# EAGLE board Auto_hub_robocon (EAGLE 8.5.1)
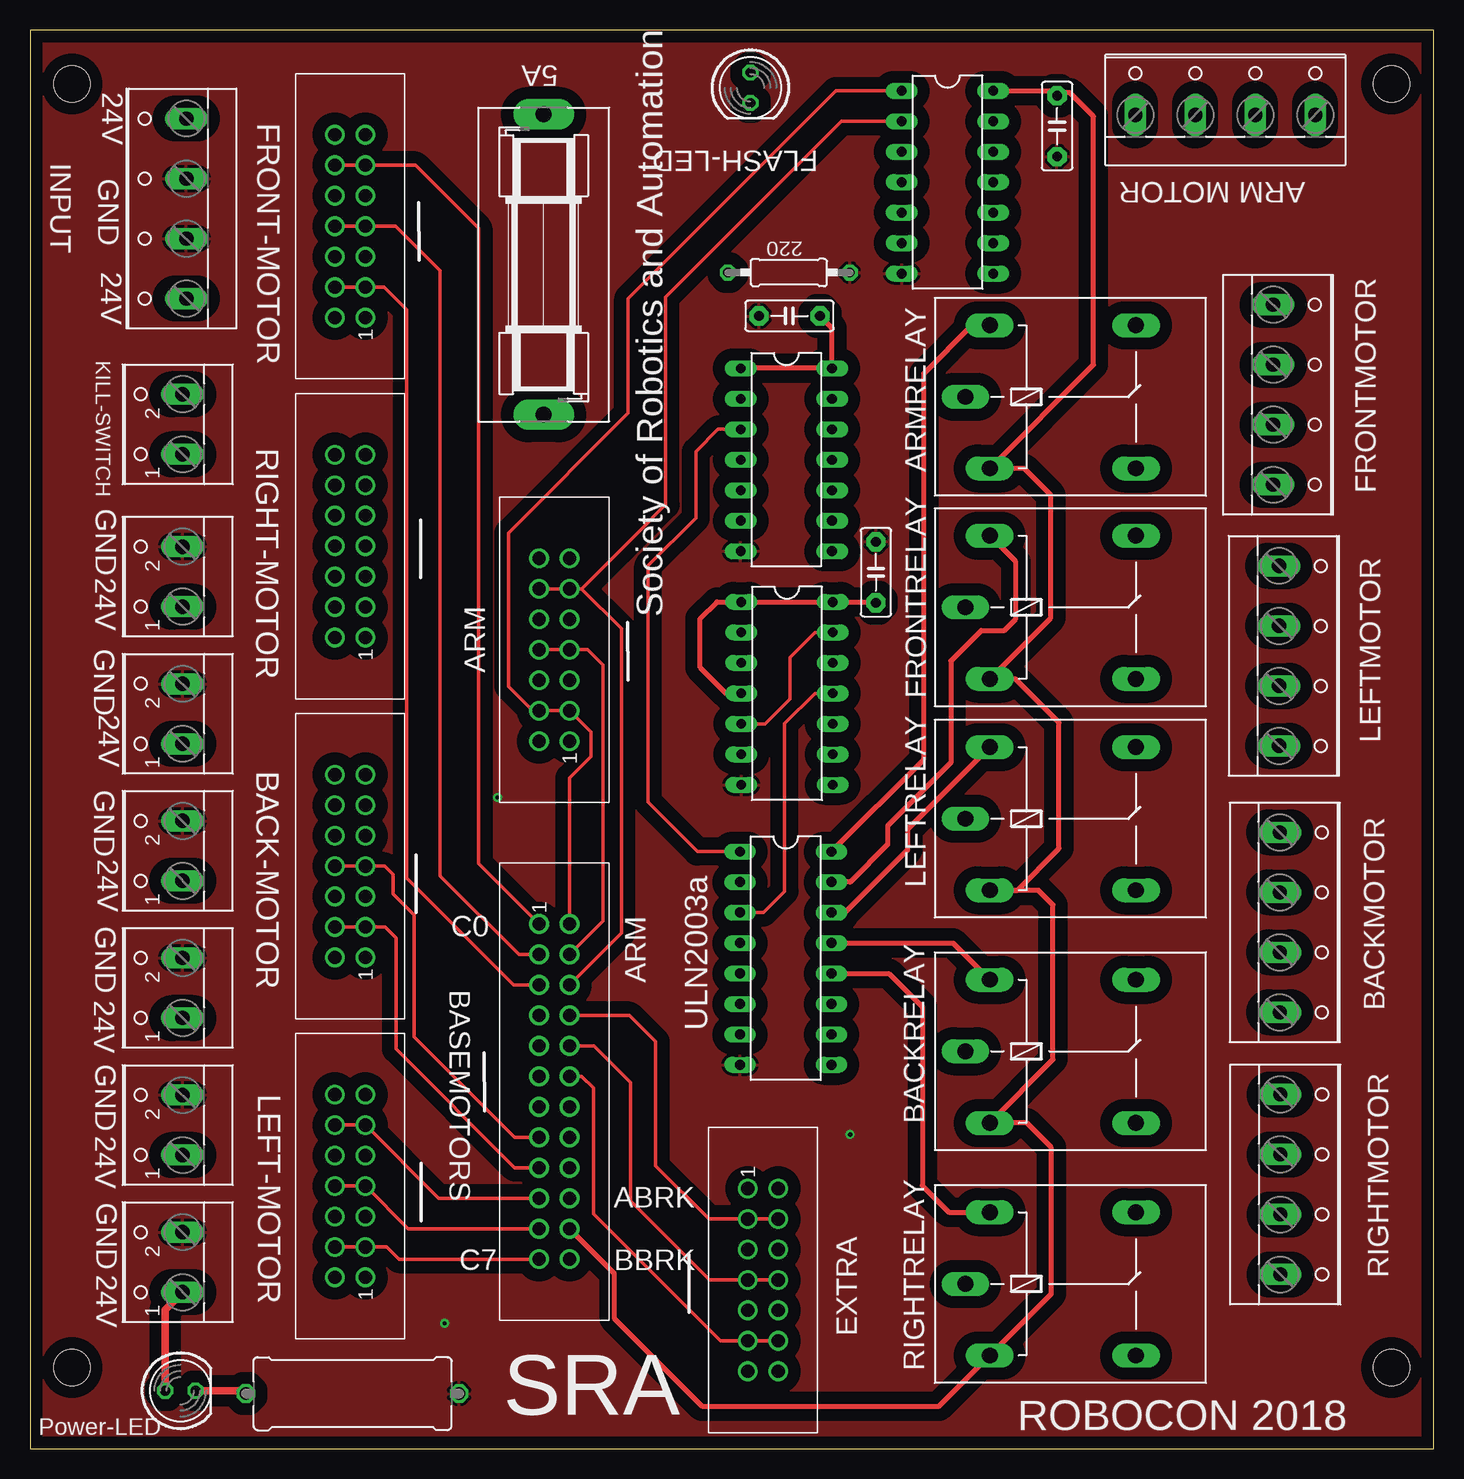
[diagram p0: board, top side]
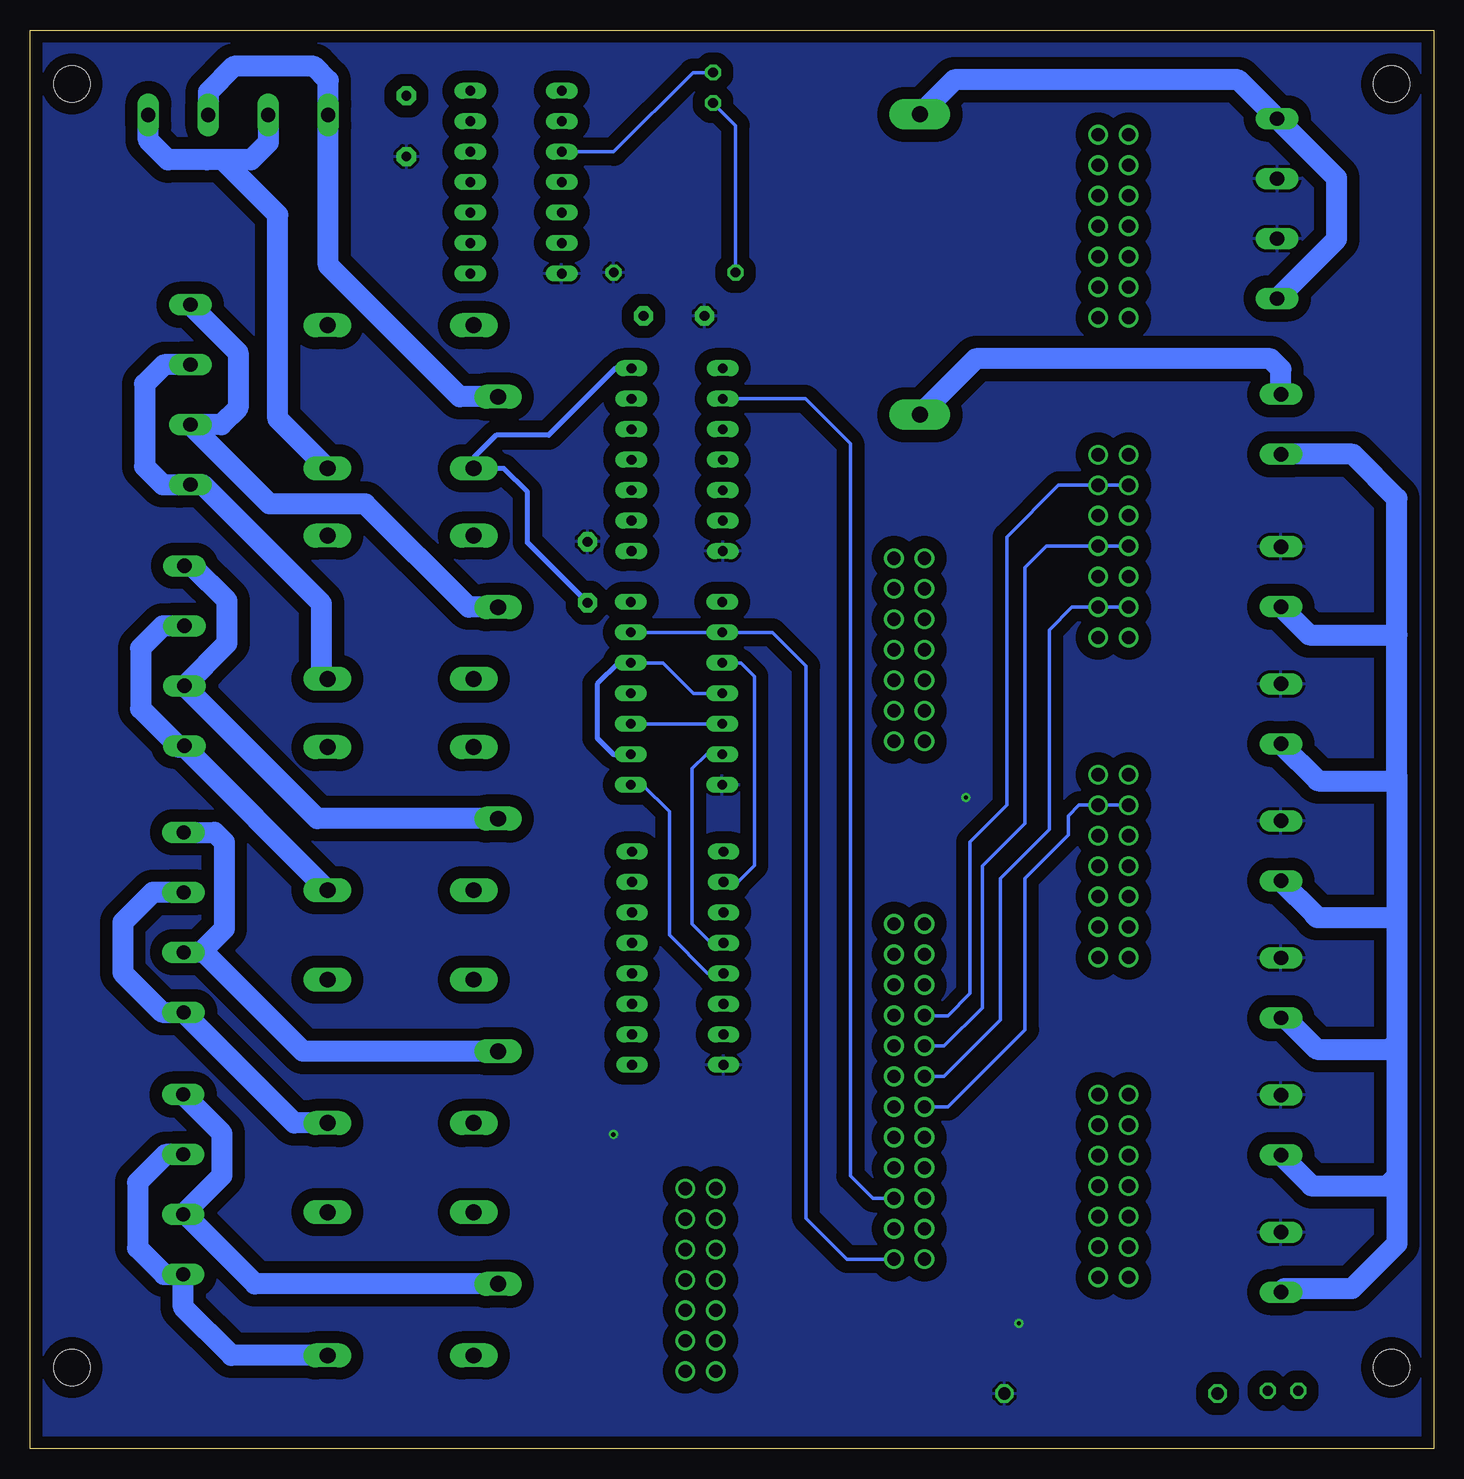
[diagram p1: board, bottom side, seen from below]

Size 117 x 118.25 mm. Coordinates in mm from the lower left corner, seen from the top.
Outline: 0,0 117,0 117,118.25 0,118.25 0,0
Copper layers (1*16): Top 0.035mm / dielectric 1.5mm / Bottom 0.035mm
Design rules "default *": minimum track width 6mil, minimum drill 0.35mm, track to track 20mil, track to pad 20mil, pad to pad 6mil, via to via 15mil, smd to smd 6mil, copper to edge 40mil, drill to drill 6mil, minimum pad ring 10mil, minimum via ring 8mil, stop-mask expansion 4mil, vias tented up to drill 0mil, thermal gap 10mil
Holes 3 mm at 3.5,113.75 3.5,6.75 113.5,6.75 113.5,113.75

## Footprints (pad centres in the part's own frame; a part is rotated, then mirrored left to right if it is on the bottom)
C5B2.5 = drill 0.813 pad 1.6 octagon: 1 -2.54,0; 2 2.54,0
SH25 = drill 1.321 pad 2.54 long: 1 -12.522,0; 2 12.522,0
0207/10 = drill 0.813 octagon: 1 -5.08,0; 2 5.08,0
61201421621 = drill 1.1: 1 -7.62,-1.27; 2 -7.62,1.27; 3 -5.08,-1.27; 4 -5.08,1.27; 5 -2.54,-1.27; 6 -2.54,1.27; 7 0,-1.27; 8 0,1.27; 9 2.54,-1.27; 10 2.54,1.27; 11 5.08,-1.27; 12 5.08,1.27; 13 7.62,-1.27; 14 7.62,1.27
G5LE = drill 1.321 long: 1 -7.493,-5.969; 2 -7.493,5.969; O 4.699,5.969; P -9.525,0; S 4.699,-5.969
DIL14 = drill 0.813 long: 1 -7.62,-3.81; 2 -5.08,-3.81; 3 -2.54,-3.81; 4 0,-3.81; 5 2.54,-3.81; 6 5.08,-3.81; 7 7.62,-3.81; 8 7.62,3.81; 9 5.08,3.81; 10 2.54,3.81; 11 0,3.81; 12 -2.54,3.81; 13 -5.08,3.81; 14 -7.62,3.81
DIL16 = drill 0.813 long: 1 -8.89,-3.81; 2 -6.35,-3.81; 3 -3.81,-3.81; 4 -1.27,-3.81; 5 1.27,-3.81; 6 3.81,-3.81; 7 6.35,-3.81; 8 8.89,-3.81; 9 8.89,3.81; 10 6.35,3.81; 11 3.81,3.81; 12 1.27,3.81; 13 -1.27,3.81; 14 -3.81,3.81; 15 -6.35,3.81; 16 -8.89,3.81
61202421621 = drill 1.1: 1 -13.97,-1.27; 2 -13.97,1.27; 3 -11.43,-1.27; 4 -11.43,1.27; 5 -8.89,-1.27; 6 -8.89,1.27; 7 -6.35,-1.27; 8 -6.35,1.27; 9 -3.81,-1.27; 10 -3.81,1.27; 11 -1.27,-1.27; 12 -1.27,1.27; 13 1.27,-1.27; 14 1.27,1.27; 15 3.81,-1.27; 16 3.81,1.27; 17 6.35,-1.27; 18 6.35,1.27; 19 8.89,-1.27; 20 8.89,1.27; 21 11.43,-1.27; 22 11.43,1.27; 23 13.97,-1.27; 24 13.97,1.27
W237-102 = drill 1.194 long: 1 -2.5,-1.27; 2 2.5,-1.27
LED5MM = drill 0.813 octagon: A -1.27,0; K 1.27,0
0617/17 = drill 1.016 octagon: 1 -8.89,0; 2 8.89,0
W237-4 = drill 1.194 long: 1 -7.5,-1.27; 2 -2.5,-1.27; 3 2.5,-1.27; 4 7.5,-1.27

## Placement (x,y rotation side)
0.1-UF  0.1uF  [C5B2.5]  85.62,110.24 270 top
5A  FUSESH35  [SH25]  42.82,98.7 90 top
220  [0207/10]  63.26,98.03 0 top
ARM  [61201421621]  43.71,66.58 90 top
ARMBRAKE  G5LE  [G5LE]  87.5,87.67 0 top
BACK-MOTOR  [61201421621]  26.69,48.55 90 top
BRAKEB  G5LE  [G5LE]  87.5,33.11 0 top
BRAKEB1  G5LE  [G5LE]  87.5,13.72 0 top
BRAKEF  G5LE  [G5LE]  87.5,70.13 0 top
BRAKEL  G5LE  [G5LE]  87.5,52.51 0 top
C1  0.1uF  [C5B2.5]  63.31,94.41 180 top
C2  0.1uF  [C5B2.5]  70.52,73.04 90 top
EXTRA  [61201421621]  61.1,14.05 270 top
FRONT-MOTOR  [61201421621]  26.69,101.89 90 top
IC1  7400 NAND  [DIL14]  63.1,62.95 270 top
IC2  ULN2003AN  [DIL16]  63,40.87 270 top
IC3  7486-EXOR  [DIL14]  76.48,105.56 270 top
IC4  7400 NAND  [DIL14]  63.05,82.42 270 top
J1  [61202421621]  43.71,29.75 270 top
KILL-SWITCH  [W237-102]  11.45,85.38 90 top
LED1  [LED5MM]  12.54,4.82 0 top
LED2  [LED5MM]  60.06,113.43 270 top
LEFT-MOTOR  [61201421621]  26.69,21.88 90 top
R1  1.2k  [0617/17]  26.89,4.58 0 top
RIGHT-MOTOR  [61201421621]  26.69,75.22 90 top
SUPPLY1  [W237-102]  11.45,72.68 90 top
SUPPLY2  [W237-102]  11.45,61.25 90 top
SUPPLY3  [W237-102]  11.45,49.82 90 top
SUPPLY4  [W237-102]  11.45,38.39 90 top
SUPPLY5  [W237-102]  11.45,26.96 90 top
SUPPLY6  [W237-102]  11.45,15.53 90 top
X1  [W237-4]  11.77,103.36 90 top
X11  [W237-4]  99.64,112.44 0 top
X12  [W237-4]  104.91,87.85 270 top
X13  [W237-4]  105.39,66.08 270 top
X14  [W237-4]  105.46,43.86 270 top
X15  [W237-4]  105.5,22.01 270 top

## Library data of the parts
0.1-UF C1 C2 = capacitor-wima
5A = fuse; OC_FARNELL: unknown; OC_NEWARK: unknown
220 R1 = resistor
ARM BACK-MOTOR EXTRA FRONT-MOTOR J1 LEFT-MOTOR RIGHT-MOTOR = Wurth_Elektronik_Electromechanic_Wire_to_Board_Connectors_rev17b
ARMBRAKE BRAKEB BRAKEB1 BRAKEF BRAKEL = relay; OC_FARNELL: unknown; OC_NEWARK: unknown
IC1 IC4 = 74xx-eu
IC2 = uln-udn
IC3 = 74xx-us
KILL-SWITCH SUPPLY1-SUPPLY6 = con-wago-500; MPN: 237-102; OC_FARNELL: unknown; OC_NEWARK: 70K9898
LED1 LED2 = led
X1 X11-X15 = con-wago-500; OC_FARNELL: unknown; OC_NEWARK: unknown

## Nets
5V: 0.1-UF.1 ARMBRAKE.1 BRAKEB1.1 BRAKEB.1 BRAKEF.1 BRAKEL.1 C1.1 C2.1 IC1.1 IC1.4 IC1.9 IC1.12 IC1.14 IC3.14 IC4.1 IC4.14 J1.22
ARM1: ARMBRAKE.P X11.1 X11.3
ARM2: ARMBRAKE.S X11.2 X11.4
ARMBRAKE: IC4.2 J1.20
ARMIN1: ARM.3 ARM.4 IC3.1 J1.2
ARMIN2: ARM.11 ARM.12 IC3.2 J1.6
ARMPWM: ARM.7 ARM.8 J1.4
BASEBRAKE: IC1.2 IC1.5 IC1.10 IC1.13 J1.24
BIN1: BACK-MOTOR.11 BACK-MOTOR.12 J1.13
BIN2: BACK-MOTOR.3 BACK-MOTOR.4 J1.17
BPWM: BACK-MOTOR.7 BACK-MOTOR.8 J1.15
BRAKEB1: BRAKEB.P X14.1 X14.3
BRAKEB2: BRAKEB.S X14.2 X14.4
BRAKEF1: BRAKEF.P X12.1 X12.3
BRAKEF2: BRAKEF.S X12.2 X12.4
BRAKEL1: BRAKEL.P X13.1 X13.3
BRAKEL2: BRAKEL.S X13.2 X13.4
BRAKER1: BRAKEB1.P X15.1 X15.3
BRAKER2: BRAKEB1.S X15.2 X15.4
EXTRAIN1: EXTRA.3 EXTRA.4 J1.8
EXTRAIN2: EXTRA.11 EXTRA.12 J1.12
EXTRAPWM: EXTRA.7 EXTRA.8 J1.10
FIN1: FRONT-MOTOR.11 FRONT-MOTOR.12 J1.1
FIN2: FRONT-MOTOR.3 FRONT-MOTOR.4 J1.5
FPWM: FRONT-MOTOR.7 FRONT-MOTOR.8 J1.3
GND: 0.1-UF.2 220.2 C1.2 C2.2 IC1.7 IC2.8 IC3.7 IC4.7 R1.2 SUPPLY1.2 SUPPLY2.2 SUPPLY3.2 SUPPLY4.2 SUPPLY5.2 SUPPLY6.2 X1.2 X1.3
LIN1: J1.19 LEFT-MOTOR.11 LEFT-MOTOR.12
LIN2: J1.23 LEFT-MOTOR.3 LEFT-MOTOR.4
LPWM: J1.21 LEFT-MOTOR.7 LEFT-MOTOR.8
N$1: ARMBRAKE.2 IC2.16
N$2: BRAKEF.2 IC2.15
N$3: BRAKEL.2 IC2.14
N$5: BRAKEB.2 IC2.13
N$6: BRAKEB1.2 IC2.12
N$8: 5A.2 X1.1 X1.4
N$9: 5A.1 KILL-SWITCH.2
N$10: KILL-SWITCH.1 LED1.A SUPPLY1.1 SUPPLY2.1 SUPPLY3.1 SUPPLY4.1 SUPPLY5.1 SUPPLY6.1
N$11: LED1.K R1.1
N$12: IC3.3 LED2.A
N$13: 220.1 LED2.K
RIN1: J1.7 RIGHT-MOTOR.11 RIGHT-MOTOR.12
RIN2: J1.11 RIGHT-MOTOR.3 RIGHT-MOTOR.4
RPWM: J1.9 RIGHT-MOTOR.7 RIGHT-MOTOR.8
ULNARM: IC2.1 IC4.3
ULNB: IC1.8 IC2.5
ULNF: IC1.6 IC2.4
ULNL: IC1.11 IC2.3
ULNR: IC1.3 IC2.2

## Tracks (layer width: path | path; a pad name or v marks a point on that pad's centre or on a via)
5V
  Top 0.406: IC3.14 85.22,113.18 85.38,113.02 | 85.38,113.02 0.1-UF.1 | 59.33,62.99 IC1.4 58.02,62.95 55.86,65.11 55.86,69.18 57.25,70.57 IC1.1 IC1.14 70.45,70.57 C2.1 | IC4.1 IC4.14 66.86,93.4 C1.1 | 85.38,113.02 86.68,113.02 88.65,111.05 88.65,90.34 ARMBRAKE.1 82.88,81.7 85.09,79.5 85.09,69.24 BRAKEF.1 82.13,64.16 85.78,60.51 85.78,50.02 82.29,46.54 BRAKEL.1 84.08,46.54 85.29,45.33 85.29,32.42 BRAKEB.1 83.09,27.14 85.14,25.1 85.14,12.88 BRAKEB1.1 75.79,3.54 56.02,3.54 48.7,10.86 48.7,14.6 J1.22
  Bottom 0.305: IC1.4 61.69,62.95 64.23,65.49 IC1.12
  Bottom 0.406: IC1.12 67.93,65.49 69.71,63.71 69.71,59.23 68.36,57.87 IC1.9 | C2.1 75.53,75.52 75.53,79.73 77.5,81.7 ARMBRAKE.1 80.01,82.59 78.13,84.46 73.77,84.46 68.18,90.04 IC4.14
ARM1
  Bottom 1.77: X11.3 102.14,113.08 100,115.21 93.32,115.21 92.14,114.03 X11.1 92.14,98.63 81.19,87.67 ARMBRAKE.P
ARM2
  Bottom 1.77: X11.2 97.14,108.86 98.56,107.43 100.93,107.43 | X11.4 107.14,109.07 105.48,107.42 105.47,107.43 102.25,107.43 100.93,107.43 | ARMBRAKE.S 96.34,85.85 96.34,102.84 100.93,107.43
ARMBRAKE
  Bottom 0.305: IC4.2 52.36,87.5 48.61,83.75 48.61,22.73 47.39,21.51 46.74,20.86 J1.20
ARMIN1
  Top 0.254: 42.51,61.5 ARM.4
  Top 0.305: J1.2 44.98,55.92 46.76,57.69 46.76,59.73 ARM.3 42.51,61.5 41.9,61.5 39.88,63.52 39.88,76.33 49.86,86.31 49.86,95.87 67.17,113.18 IC3.1
ARMIN2
  Top 0.305: ARM.12 ARM.11 45.99,71.66 | J1.6 49.3,42.96 49.3,68.36 45.99,71.66 | 45.99,71.66 50.72,76.39 50.72,76.4 53,78.67 53,96 67.64,110.64 IC3.2
ARMPWM
  Top 0.305: ARM.8 ARM.7 46.48,66.58 47.77,65.3 47.77,43.98 J1.4
BASEBRAKE
  Top 0.305: IC1.13 65.44,68.03 63.34,65.93 63.34,62.48 61.27,60.41 IC1.5
  Bottom 0.305: IC1.13 IC1.2 55.11,68.03 52.3,65.22 52.3,19.21 48.88,15.78 J1.24 | IC1.5 IC1.10
BIN1
  Bottom 0.305: BACK-MOTOR.12 BACK-MOTOR.11 29.55,53.63 30.45,52.72 30.45,51.14 34.06,47.53 34.06,34.91 40.49,28.48 J1.13
BIN2
  Top 0.305: BACK-MOTOR.4 BACK-MOTOR.3 29.59,43.47 30.5,42.56 30.5,33.31 40.41,23.4 J1.17
BPWM
  Top 0.305: BACK-MOTOR.8 BACK-MOTOR.7 29.55,48.55 30.26,47.84 30.26,46.25 32.02,44.49 32.02,34.3 40.38,25.94 J1.15
BRAKEB1
  Bottom 1.77: BRAKEB.P 94.24,33.11 102.49,41.36 X14.3 102.77,41.36 100.8,43.32 100.8,50.55 101.61,51.36 X14.1
BRAKEB2
  Bottom 1.77: BRAKEB.S 94.98,27.14 X14.4 105.97,36.36 109.27,39.66 109.27,43.85 106.77,46.36 X14.2
BRAKEF1
  Bottom 1.77: X12.1 99.65,91.36 99.65,86.74 101.04,85.35 X12.3 97.03,78.75 89.06,78.75 80.44,70.13 BRAKEF.P
BRAKEF2
  Bottom 1.77: X12.2 105.83,90.35 107.45,88.73 107.45,81.87 105.93,80.35 X12.4 102.61,80.35 92.69,70.44 92.69,64.65 BRAKEF.S
BRAKEL1
  Bottom 1.77: BRAKEL.P 93.05,52.51 X13.3 100.58,67.13 100.58,70.67 103.48,73.58 X13.1
BRAKEL2
  Bottom 1.77: BRAKEL.S 104.12,58.46 | 104.12,58.46 X13.4 | X13.2 105.94,68.58 107.79,66.72 107.79,61.68 104.57,58.46 104.12,58.46
BRAKER1
  Bottom 1.77: BRAKEB1.P 98.25,13.72 104.04,19.52 X15.3 100.98,22.76 100.98,26.27 X15.1
BRAKER2
  Bottom 1.77: BRAKEB1.S 100.2,7.75 104.23,11.78 X15.4 105.83,14.52 108.04,16.72 108.04,22.18 105.71,24.52 X15.2
EXTRAIN1
  Top 0.305: EXTRA.4 EXTRA.3 56.58,19.13 52.15,23.57 52.15,33.93 49.97,36.1 J1.8
EXTRAIN2
  Top 0.305: EXTRA.12 EXTRA.11 57.57,8.97 46.96,19.58 46.96,30.06 45.99,31.02 J1.12
EXTRAPWM
  Top 0.305: EXTRA.8 EXTRA.7 | EXTRA.7 59.69,14.05 | J1.10 47.04,33.56 50.08,30.53 50.08,20.63 56.66,14.05 EXTRA.7
FIN1
  Top 0.305: FRONT-MOTOR.12 FRONT-MOTOR.11 32.15,106.97 37.39,101.72 37.39,48.77 J1.1
FIN2
  Top 0.305: FRONT-MOTOR.4 FRONT-MOTOR.3 29.53,96.81 31.41,94.93 31.41,47.55 40.32,38.64 J1.5
FPWM
  Top 0.305: FRONT-MOTOR.8 FRONT-MOTOR.7 30.49,101.89 34.2,98.18 34.2,47.74 40.76,41.18 J1.3
GND  (via drill 0.35)
  other vias: 34.56,10.45 38.99,54.27 68.37,26.17
  pour Top (isolate 1.016): 0.5,117.75 116.5,117.75 116.5,0.5 0.5,0.5
  pour Bottom (isolate 1.016): 0.5,117.75 116.5,117.75 116.5,0.5 0.5,0.5
LIN1
  Top 0.305: LEFT-MOTOR.12 LEFT-MOTOR.11 34.06,20.86 J1.19
LIN2
  Top 0.305: LEFT-MOTOR.4 LEFT-MOTOR.3 29.74,16.8 30.75,15.78 J1.23
LPWM
  Top 0.305: LEFT-MOTOR.8 LEFT-MOTOR.7 31.52,18.32 J1.21
N$1
  Top 0.406: IC2.16 74.51,57.45 74.51,89.61 78.53,93.64 ARMBRAKE.2
N$2
  Top 0.406: BRAKEF.2 82.17,73.93 82.17,69.15 81.23,68.21 79.31,68.21 76.76,65.66 76.76,57.17 71.5,51.91 71.5,50.34 68.38,47.22 IC2.15
N$3
  Top 0.406: IC2.14 67.94,44.68 73.19,49.92 73.19,51.65 BRAKEL.2
N$5
  Top 0.406: IC2.13 76.95,42.14 BRAKEB.2
N$6
  Top 0.406: IC2.12 71.6,39.6 74.38,36.82 74.38,21.9 76.59,19.69 BRAKEB1.2
N$8
  Bottom 1.77: 5A.2 39.95,114.1 16.28,114.1 X1.4 8.08,105.9 8.08,100.81 X1.1
N$9
  Bottom 1.77: KILL-SWITCH.2 12.72,89.97 13.6,90.85 38.15,90.85 5A.1
N$10
  Top 0.61: SUPPLY6.1 11.27,11.58 LED1.A
  Bottom 1.77: SUPPLY6.1 12.47,13.28 arc45 12.29,13.35 6.78,13.35 3.12,17.01 arc-45 3.04,17.19 3.04,22.68 | 3.04,33.86 3.04,22.68 | 3.04,44.27 3.04,33.86 | 3.04,56.04 3.04,44.27 | 3.04,56.04 3.04,67.82 | 3.04,67.82 3.04,79.2 6.65,82.81 arc-45 6.83,82.88 KILL-SWITCH.1 | SUPPLY1.1 10.43,67.89 arc-45 10.25,67.82 3.04,67.82 | SUPPLY5.1 10.23,21.96 arc-45 10.05,21.89 3.93,21.89 arc-45 3.75,21.96 3.04,22.68 | SUPPLY4.1 12.43,35.89 arc45 12.25,35.82 9.71,33.27 3.74,33.27 arc-45 3.56,33.35 3.04,33.86 | SUPPLY3.1 9.94,44.54 arc45 9.91,44.46 9.79,44.34 arc-45 9.61,44.27 3.04,44.27 | SUPPLY2.1 9.69,55.72 arc-45 9.52,55.65 3.54,55.65 arc-45 3.36,55.72 3.04,56.04
N$11
  Top 0.61: LED1.K 17.75,4.82 R1.1
N$12
  Bottom 0.305: LED2.A 61.74,114.7 68.34,108.1 IC3.3
N$13
  Bottom 0.305: 220.1 58.18,110.29 LED2.K
RIN1
  Bottom 0.305: RIGHT-MOTOR.12 RIGHT-MOTOR.11 31.26,80.3 35.58,75.98 35.58,53.63 38.63,50.58 38.63,37.93 40.49,36.07 42.4,36.07 J1.7
RIN2
  Bottom 0.305: RIGHT-MOTOR.4 RIGHT-MOTOR.3 30.13,70.14 32.02,68.24 32.02,51.6 36.09,47.53 36.09,35.73 40.8,31.02 J1.11
RPWM
  Bottom 0.305: RIGHT-MOTOR.8 RIGHT-MOTOR.7 32.28,75.22 34.06,73.44 34.06,52.11 37.61,48.55 37.61,36.75 40.8,33.56 J1.9
ULNARM
  Top 0.305: IC2.1 55.65,49.76 51.53,53.88 51.53,73.59 55.5,77.56 55.5,83.11 57.36,84.96 IC4.3
ULNB
  Bottom 0.305: IC2.5 60.51,39.6 63.71,42.79 63.71,53.11 65.93,55.33 IC1.8
ULNF
  Bottom 0.305: IC1.6 60.6,57.87 61.79,56.68 61.79,43.71 60.22,42.14 IC2.4
ULNL
  Top 0.305: IC1.11 65.44,62.95 62.91,60.43 62.91,46.46 61.14,44.68 IC2.3
ULNR
  Bottom 0.305: IC2.2 57.99,47.22 56.61,48.6 56.61,64.36 57.74,65.49 IC1.3

## Text on the board
tNames: 24V | FLASH-LED | INPUT | GND | ARM MOTOR | 24V | ARMRELAY | FRONTMOTOR | GND | 24V | Society of Robotics and Automation | GND | FRONTRELAY | 24V | LEFTMOTOR | GND | 24V | LEFTRELAY | GND | C0 | BASEMOTORS | ARM | 24V | BACKMOTOR | ULN2003a | GND | BACKRELAY | 24V | GND | ABRK | 24V | C7 | BBRK | RIGHTMOTOR | RIGHTRELAY | ROBOCON 2018 | SRA | Power-LED